# Altium PCB BIO26_sensor_connect.PcbDoc
Units mm, origin at the board's own origin, x right, y up, seen from the top; angles counter-clockwise.
Board outline 20 x 62.5 mm, 2 copper layers (Top Layer, Bottom Layer); 11 components, 10 nets, 63 pads, 36 vias.
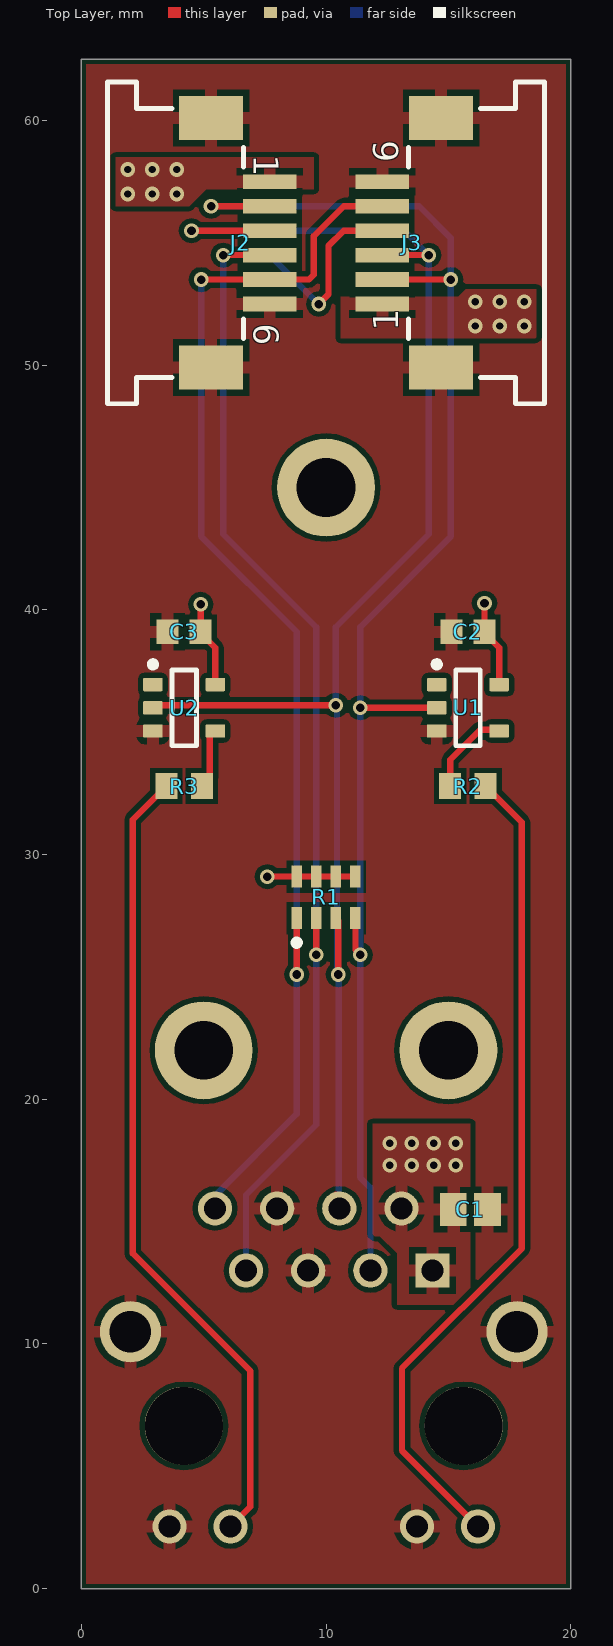
[diagram p0: Top Layer view]
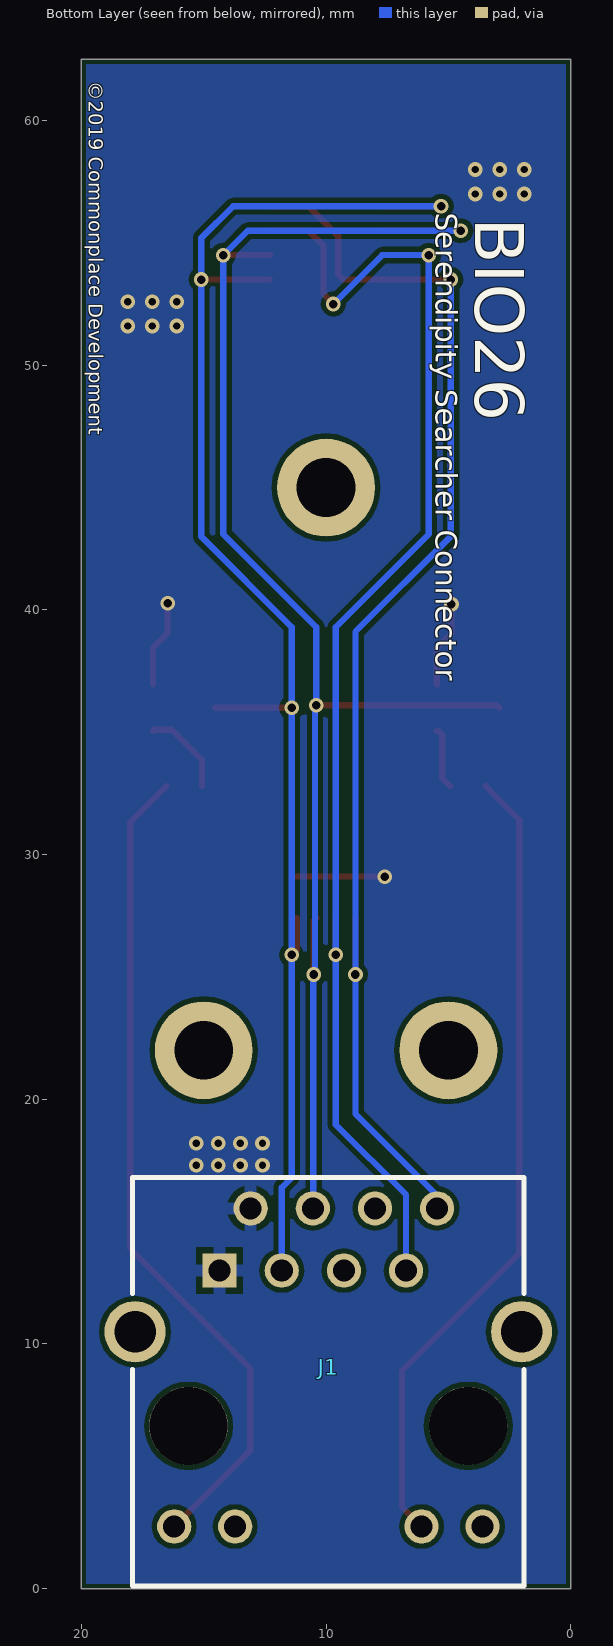
[diagram p1: Bottom Layer view, seen from below]
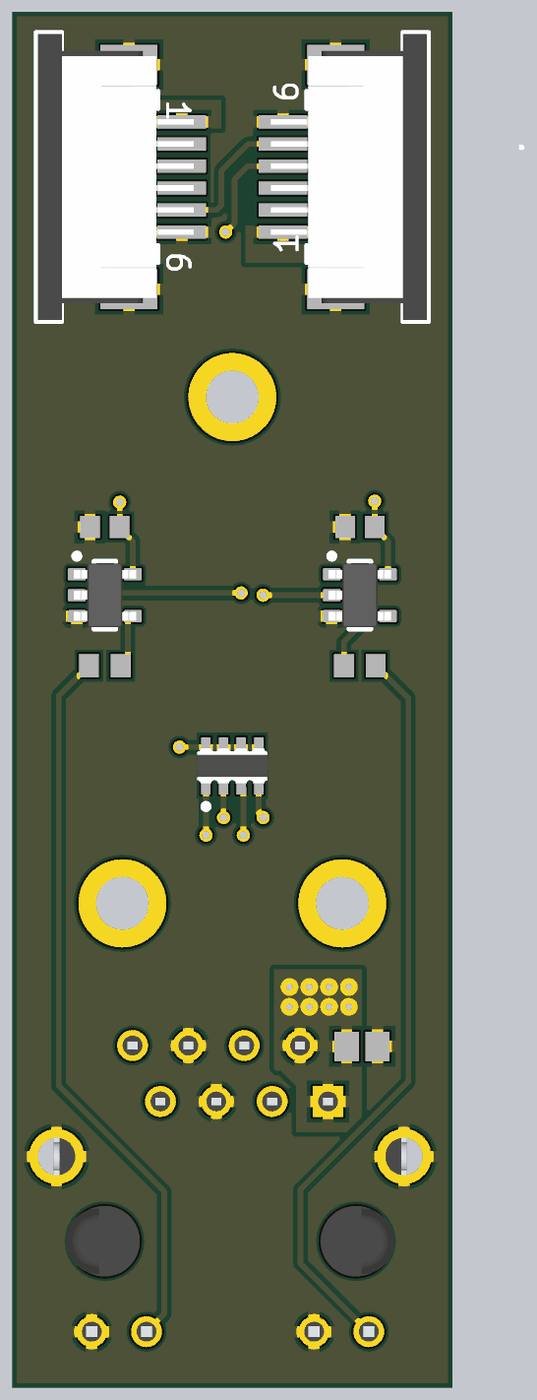
[diagram p2: 3D render of the assembled board from above, using the file's embedded part models]

## Layer stack, top to bottom
Top Solder: solder mask 0.0102, Solder Resist, Dk 3.5
Top Layer: signal copper 0.0356
Dielectric 1: dielectric 0.32, FR-4, Dk 4.8
Bottom Layer: signal copper 0.0356
Bottom Solder: solder mask 0.0102, Solder Resist, Dk 3.5

## Board outline
0,0 20,0 20,62.5 0,62.5

## Design rules (kind name [scope] priority, off if disabled: settings)
BoardOutlineClearance [All] p1: gap=0.2 ignorepadtopadclearanceinfootprint=FALSE except(0.4: Arc-SplitBarrior Arc-SplitContinuation Track-SplitBarrior Track-SplitContinuation SMDPad-SplitBarrior SMDPad-SplitContinuation THPad-SplitBarrior THPad-SplitContinuation Via-SplitBarrior Via-SplitContinuation Fill-SplitBarrior Fill-SplitContinuation Poly-SplitBarrior Poly-SplitContinuation Region-SplitBarrior Region-SplitContinuation Text-SplitBarrior Text-SplitContinuation)
Clearance "Clearance Bottom Layer" [OnLayer('Bottom Layer')] p1: gap=0.203 ignorepadtopadclearanceinfootprint=TRUE except(0.254: Arc-Text Track-Text SMDPad-Text THPad-Text Via-Text Fill-Text Poly-Text Region-Text Text-Text)
Clearance "Clearance Top Layer" [OnLayer('Top Layer')] p2: gap=0.203 ignorepadtopadclearanceinfootprint=TRUE except(0.254: Arc-Text Track-Text SMDPad-Text THPad-Text Via-Text Fill-Text Poly-Text Region-Text Text-Text)
Clearance [All] p3: gap=0.2 ignorepadtopadclearanceinfootprint=FALSE except(0.089: Arc-Arc Arc-Track Arc-SMDPad Track-Track Track-SMDPad SMDPad-SMDPad; 0.127: Arc-Via Track-Via SMDPad-Via THPad-Via Via-Via; 0.254: Arc-Text Track-Text SMDPad-Text THPad-Text Via-Text Fill-Text Poly-Text Region-Text Text-Text)
HoleSize [All] p1: absolutevalues=TRUE maxlimit=6.3 minlimit=0.2 maxpercent=80.000 minpercent=20.000
MinimumAnnularRing [All] p1: minimumring=0.076
MinimumSolderMaskSliver [All] p1: minsoldermaskwidth=0.1
PolygonConnect PolygonConnect_1 [All] p1: thpad.connectstyle=Relief thpad.reliefconductorwidth=0.508 thpad.reliefentries=4 thpad.polygonreliefangle="90 Angle" thpad.airgapwidth=0.254 smdpad.connectstyle=Relief smdpad.reliefconductorwidth=0.508 smdpad.reliefentries=4 smdpad.polygonreliefangle="90 Angle" smdpad.airgapwidth=0.254 via.connectstyle=Direct via.reliefconductorwidth=0.508 via.reliefentries=4 via.polygonreliefangle="90 Angle" via.airgapwidth=0.254
PolygonConnect [All] p2: connectstyle=Relief reliefconductorwidth=0.254 reliefentries=4 polygonreliefangle="90 Angle" airgapwidth=0.254
RoomDefinition BIO26_sensor_connect [InComponentClass('BIO26_sensor_connect')] p1: confinementstyle=ConfineIn formatcopy=TRUE lockcomponents=FALSE outline 0.277,-0.379 0.277,17.279 0.596,17.279 0.596,62.054 9.279,62.054 19.404,62.054 19.404,17.279 19.535,17.279 19.535,-0.379
RoutingCorners [All] p1: cornerstyle=Round minsetback=2.54 maxsetback=2.54
RoutingVias [All] p1: holewidth=0.5 width=1 viastyle="Through Hole" minholewidth=0.2 minwidth=0.45 maxholewidth=1 maxwidth=2
SilkToSilkClearance [All] p1: silktosilkclearance=0.1
SilkToSolderMaskClearance [IsPad] p1: minsilkscreentomaskgap=0.1 clearancetoexposedcopper=TRUE
SolderMaskExpansion [All] p1: expansion=0.102
Width [All] p1: maxlimit=2.54 minlimit=0.089 preferedwidth=0.381
25 further rules are at their usual default settings.

## Components (designator, comment, footprint, x,y, rotation, side; value= is the part's Value field where it differs from the comment)
C1 "10uF" CAPC2013X140X50LL20T25 15.9,15.5 r180 top
C2 "0.1uF" CAPC1608X87X35NL15T15 15.8,39.1 r180 top
C3 "0.1uF" CAPC1608X87X35NL15T15 4.2,39.1 r180 top
J1 "615008138321" 615008138321 9.906,8.45 r180 bottom
J2 "68610614422" 68610614422 3.85,55 r270 top locked
J3 "68610614422" 68610614422 16.15,55 r90 top locked
R1 "10K" BOUR-CAY16-J4_V 10,28.25 r90 top
R2 "1K" RESC1608X55X30ML15T15 15.8,32.8 r0 top
R3 "1K" RESC1608X55X30ML15T15 4.2,32.8 r180 top
U1 "SN74AHC1G14DBVR" DBV0005A_L 15.8,36 r0 top
U2 "SN74AHC1G14DBVR" DBV0005A_L 4.2,36 r0 top

## Footprints (in the part's own frame and the unit in brackets; to place one, negate y for a bottom-side part, rotate by r counter-clockwise, add the part's x,y. Pads: shape width x height; smd on the part's side, far side on the other; paste and mask are expansions set on the pad)
68610614422 [mm] "ZIF Connectors, Horizontal, Bottom Contact, pitch 1mm, 6p"
  rect 0.6x2.2 smd: 1(-2.5,3.85) 2(-1.5,3.85) 3(-0.5,3.85) 4(0.5,3.85) 5(1.5,3.85) 6(2.5,3.85)
  rect 1.8x2.6 smd: MP1(-5.1,1.45) MP2(5.1,1.45)
  silkscreen extent -6.57,-2.78 6.58,2.78, body extent -6.5,-2.7 6.5,4.4, height 3.02
615008138321 [mm] "Modular Jack Vertical Shielded 8P8C with LED"
  rect 1.4x1.4 hole 0.9: 1(-4.445,4.55)
  round 1.4 hole 0.9: 2(-3.175,7.09) 3(-1.905,4.55) 4(-0.635,7.09) 5(0.635,4.55) 6(1.905,7.09) 7(3.175,4.55) 8(4.445,7.09) 9(6.3,-5.91) 10(3.81,-5.91) 11(-3.81,-5.91) 12(-6.3,-5.91)
  round 3.2 hole 3.2 unplated: MH1(-5.715,-1.8) MH2(5.715,-1.8)
  round 2.5 hole 1.7: S1(-7.9,2.05) S2(7.9,2.05)
  silkscreen extent -8,-8.35 8,8.35, body extent -8.02,-8.35 8.03,8.35, height 16.57
BOUR-CAY16-J4_V [mm] "SMD, 8-Leads, Body 1.6x3.2mm, Pitch 0.8mm"
  rect 0.9x0.425 smd: 1(-0.85,1.2) 2(-0.85,0.4) 3(-0.85,-0.4) 4(-0.85,-1.2) 5(0.85,-1.2) 6(0.85,-0.4) 7(0.85,0.4) 8(0.85,1.2)
  silkscreen extent -1.97,1.07 -1.73,1.32, body extent -0.8,-1.6 0.8,1.6, height 0.6
CAPC1608X87X35NL15T15 [mm] "Chip Capacitor, 2-Leads, Body 1.60x0.80mm, IPC Medium Density"
  rect 0.9x1 smd: 1(-0.675,0) 2(0.675,0)
  body extent -0.87,-0.48 0.87,0.47, height 0.87
CAPC2013X140X50LL20T25 [mm] "Chip Capacitor, 2-Leads, Body 2.00x1.25mm, IPC High Density"
  rect 1.1x1.35 smd: 1(-0.7,0) 2(0.7,0)
  body extent -1.1,-0.72 1.1,0.72, height 1.4
DBV0005A_L [mm] "SOT23, 5-Leads, Body 3.05x1.75mm, Pitch 0.95mm, IPC High Density"
  rrect18% 0.8x0.55 smd: 1(-1.275,0.95) 2(-1.275,0) 3(-1.275,-0.95) 4(1.275,-0.95) 5(1.275,0.95)
  silkscreen extent -1.4,-1.55 0.5,1.9, body extent -1.42,-1.46 1.42,1.46, height 1.08
RESC1608X55X30ML15T15 [mm] "Chip Resistor, 2-Leads, Body 1.60x0.80mm, IPC Low Density"
  rect 0.9x1.05 smd: 1(-0.725,0) 2(0.725,0)
  body extent -0.87,-0.48 0.87,0.48, height 0.55

## Part data
C1: library part CMP-2007-03243-1, Manufacturer=Kemet, Part Number=C0805C106K8PACTU
C2 C3: library part CMP-2006-03300-1, Manufacturer=Kemet, Part Number=C0603X104K5RACTU
J1: library part CMP-1502-01732-1, "Modular Jack WR-MJ, Shielded, with LED, Vertical Entry, THT, 8P8C", Contact Resistance=20mOhm, Manufacturer="Wurth Elektronik", Operating Temperature=-40to85degC, Rated Current=1.5A, Withstanding Voltage=1000VAC, Working Voltage=120VAC, Compliance=Leadfree/RoHS, Datasheet URL=https://katalog.we-online.com/em/datasheet/615008138321%284%29.pdf, Entrance=Vertical, Manufacturer URL=http://www.we-online.de, Mounting Technology=THT, Package Reference=615008138321, Packaging=Tray, Part Number=615008138321, Pin Number=8P8C, Port=1x1, Publisher=WurthElektronik, System=Connector
J2 J3: library part CMP-1502-01454-1, "SMT ZIF Connectors WR-FPC, Horizontal, Bottom Contact, pitch 1 mm, 6 pins", Contact Resistance=20mOhm, Manufacturer="Wurth Elektronik", Operating Temperature=-25to85degC, Rated Current=1A, Withstanding Voltage=500VAC, Working Voltage=125VAC, Contact Design=BottomContact, Datasheet URL=https://katalog.we-online.de/em/datasheet/68610614422.pdf, Manufacturer URL=http://www.we-online.de, Mounting Technology=SMT, Orientation=Horizontal, Package Reference=68610614422, Packaging=TapeandReel, Part Number=68610614422, Pin Number=6, Pitch=1mm, Publisher=WurthElektronik, System=Connector
R1: library part CMP-1747-00005-1, "Chip Resistor Array, 10 KOhm, +/- 5%, 62.5 mW, -55 to 125 degC, 8-Pin SMD, RoHS, Tape and Reel", Case\Package=0603, Case Code (Metric)=1608, Max Operating Temperature="155 degC", Min Operating Temperature="-55 degC", Power Rating="100 mW", Resistance="220 Ohm", Tolerance=1%, Voltage Rating="75 V", Case Code (Imperial)=0603, ComponentLink1Description="Manufacturer URL", ComponentLink1URL=http://www.bourns.com/, ComponentLink2Description=Datasheet, ComponentLink2URL=http://www.bourns.com/docs/Product-Datasheets/CATCAY.pdf, DatasheetVersion=Jan-15, Height="0.022 inch", Length="0.063 inch", Mount="Surface Mount", PackageDescription="8-Pin Surface Mount Device, Body 1.6 x 3.2 mm, Pitch 0.8 mm", PackageReference=CAY16-J4, Packaging="Tape and Reel", Pins=2, Radiation Hardening=No, REACH SVHC=Yes, RoHSCompliant=true, Weight="7.1E-05 oz", Width="0.031 inch"
R2 R3: library part CMP-2000-00703-1, Manufacturer=Panasonic, Part Number=ERJ-3GEYJ102V
U1 U2: library part CMP-2000-07131-1, "Single Schmitt-Trigger Inverter Gate, 10.6 ns max, 2 to 5.5 V, -40 to 125 degC, 5-Pin SOT23 (DBV), Green (RoHS & no Sb/Br), Tape and Reel", Logic Case Style=SOT-23, Manufacturer="Texas Instruments", Operating Temperature Max=85°C, Operating Temperature Min=-40°C, Operating Temperature Range=-40°Cto+85°C, Output Current=8mA, Package Description="5-Pin Small Outline Transistor, Body 2.9 x 1.6 mm, Pitch 0.95 mm", Package Reference=DBV0005A, Supply Voltage=5.5V, Supply Voltage Min=2V, Supply Voltage Range=2Vto5.5V, Base Number=74, Datasheet URL=http://www.ti.com/lit/ds/symlink/sn74ahc1g14.pdf, Datasheet Version="Rev. Q, 09/2015", IC Generic Number=74AHC1G14, Logic Function Number=741G14, Logic IC Base Number=74114, Logic IC Family=AHC, Logic IC Function=SingleInverterwithSchmittTrigger, Logic Type=Inverter, Manufacturer URL=http://www.ti.com/, Mounting Technology=SurfaceMount, No. of Gates=1, No. of Inputs=1, No. of Pins=5, Output Current Max=8mA, Package / Case=SOT-23, Package URL=http://www.ti.com/lit/ml/mpds018l/mpds018l.pdf, Supply Voltage Max=5.5V, SVHC=NoSVHC(19-Dec-2012), Termination Type=SMD

## Free pads (board coordinates)
  round 4 hole 2.4 paste+0: 9(5,22) 9(10,45) 9(15,22)

## Via types
v1: diameter 0.6, hole 0.3, Top Layer to Bottom Layer, 20 vias
v2: diameter 0.6, hole 0.35, Top Layer to Bottom Layer, 16 vias

## Nets (pads, with @x,y where several pads share a name; then routed paths per layer and width w, separated by ;. In a path a pad name is that pad's centre, name@x,y a point inside that pad or via, vN(x,y) a via of type N, cw(c..) or ccw(c..) an arc to the next point about the centre after c; other vN are vias at no path point)
GND: C1.1 C2.2 C3.2 J1.5 J1.6 J1.9 J1.11 J1.S1 J1.S2 J2.6 J2.MP1 J2.MP2 J3.6 J3.MP1 J3.MP2 U1.3 U2.3
GPIO_A: J1.7 J2.4 J3.4 R1.2 | length 57.4
  Top Layer w0.254: v2(5.8,54.5) J2.4 ; v2(9.6,25.9) R1.2 ; v2(9.7,52.5) 10.1,52.9 10.1,54.88 10.72,55.5 J3.4
  Bottom Layer w0.254: J1.7 6.731,16.092 9.6,18.961 v2(9.6,25.9) 9.6,39.3 5.8,43.1 v2(5.8,54.5) 7.7,54.5 v2(9.7,52.5)
GPIO_B: J1.8 J2.5 J3.5 R1.1 | length 52.8
  Top Layer w0.254: v2(4.9,53.5) J2.5 9.3,53.5 9.5,53.7 9.5,55.28 10.72,56.5 J3.5 ; v2(8.8,25.1) R1.1
  Bottom Layer w0.254: v2(4.9,53.5) 4.9,43 8.8,39.1 v2(8.8,25.1) 8.8,19.4 5.461,16.061 J1.8
HALL_A: J1.3 J2.2 J3.2 R1.4 U1.2 | length 64.2
  Top Layer w0.254: v2(5.3,56.5) J2.2 ; R1.4 11.2,26.1 v2(11.4,25.9) ; v2(11.4,36) U1.2 ; J3.2 v2(15.1,53.5) v2@15.15,53.55
  Bottom Layer w0.254: v2(5.3,56.5) 13.8,56.5 15.1,55.2 v2(15.1,53.5) 15.1,43 11.4,39.3 v2(11.4,36) v2(11.4,25.9) 11.4,16.8 11.811,16.389 J1.3
HALL_B: J1.4 J2.3 J3.3 R1.3 U2.2 | length 66.3
  Top Layer w0.254: U2.2 3.025,36.1 v2(10.4,36.1) ; v2(4.5,55.5) J2.3 ; J1.4@10.4,16.1 10.4,15.681 J1.4 ; R1.3 10.5,27.3 v2(10.5,25.1) ; J3.3 v2(14.2,54.5)
  Bottom Layer w0.254: v2(4.5,55.5) 13.2,55.5 v2(14.2,54.5) 14.2,43.1 10.4,39.3 v2(10.4,36.1) 10.45,36.05 10.45,25.15 v2(10.5,25.1) 10.52,25.08 10.52,15.56 J1.4
NetJ1_10: J1.10 R3.2 | length 33.6
  Top Layer w0.254: R3.2 2.1,31.425 2.1,13.7 6.9,8.9 6.9,3.344 J1.10 J1.10@6.5,2.54
NetJ1_12: J1.12 R2.2 | length 34.2
  Top Layer w0.254: J1.12 13.1,5.646 13.1,9 18,13.9 18,31.325 R2.2
NetR2_1: R2.1 U1.4 | length 3.6
  Top Layer w0.254: R2.1 15.075,33.875 16.3,35.1 17.025,35.1 U1.4
NetR3_1: R3.1 U2.4 | length 2.5
  Top Layer w0.254: R3.1 5.248,33.123 5.248,34.902 5.396,35.05 U2.4
VCC: C1.2 C2.1 C3.1 J1.1 J1.2 J2.1 J3.1 R1.5 R1.6 R1.7 R1.8 U1.5 U2.5 | length 10.7
  Top Layer w0.254: v2(4.875,40.225) C3.1 4.875,39.05 5.475,38.45 U2.5 ; v2(7.6,29.1) R1.8 R1.7 R1.6 R1.5 ; v2(16.475,40.275) C2.1 16.475,39.05 17.075,38.45 U1.5
  other v1: 12.6,17.3 13.5,17.3 14.4,17.3 15.3,17.3 12.6,18.2 13.5,18.2 14.4,18.2 15.3,18.2 16.1,51.6 17.1,51.6 18.1,51.6 16.1,52.6 17.1,52.6 18.1,52.6 1.9,57 2.9,57 3.9,57 1.9,58 2.9,58 3.9,58
pads on no net: J1.MH1 J1.MH2 U1.1 U2.1

## Polygon pours and split planes (outlines as drawn)
GND on Top Layer "GND_L01_P010" (solid, pour order 10): 0,0 20,0 20,62.5 0,62.5
VCC on Top Layer "VCC_L01_P004" (solid, pour order 4): 15.4,52.8 15.7,53.1 18.6,53.1 18.6,51.15 18.55,51.1 10.6,51.1 10.6,52.8
VCC on Top Layer "VCC_L01_P006" (solid, pour order 6): 4.4,56.5 5.1,57.2 9.3,57.2 9.5,57.2 9.5,58.5 1.4,58.5 1.4,56.5
VCC on Top Layer "VCC_L01_P002" (solid, pour order 2): 11.9,14.4 12.2,14.4 12.9,13.7 12.9,11.6 15.2,11.6 15.9,12.3 15.9,19 11.9,19
VCC on Bottom Layer "VCC_L02_P008" (solid, pour order 8): 0,62.5 20,62.5 20,0 0,0

## Silkscreen, mask and mechanical layers (free items; w line width, h text height)
Bottom Overlay:
  text "©2019 Commonplace Development" at 19.9,61.6 h1 r90
  text "Serendipity Searcher Connector" at 5.796,56.226 h1.5 r90
  text "BIO26" at 3.896,56.026 h2 r90
Outline:
  the board outline again, w0.254

## Dimensions
3.35,55 to 0,62.5 on Mechanical 1

## Text inside footprints (layer, text, board x,y; h text height)
J2: Top Overlay "1" at 7.05,58.6 h1.02 r270; Top Overlay "6" at 7.05,51.7 h1.02 r270
J3: Top Overlay "1" at 12.95,51.4 h1.02 r90; Top Overlay "6" at 12.95,58.3 h1.02 r90